# Altium PCB mosfet_STM32.PcbDoc
Units mm, origin at the board's own origin, x right, y up, seen from the top; angles counter-clockwise.
Board outline 43.5 x 29 mm, 2 copper layers (Top Layer, Bottom Layer); 31 components, 18 nets, 153 pads, 32 vias.
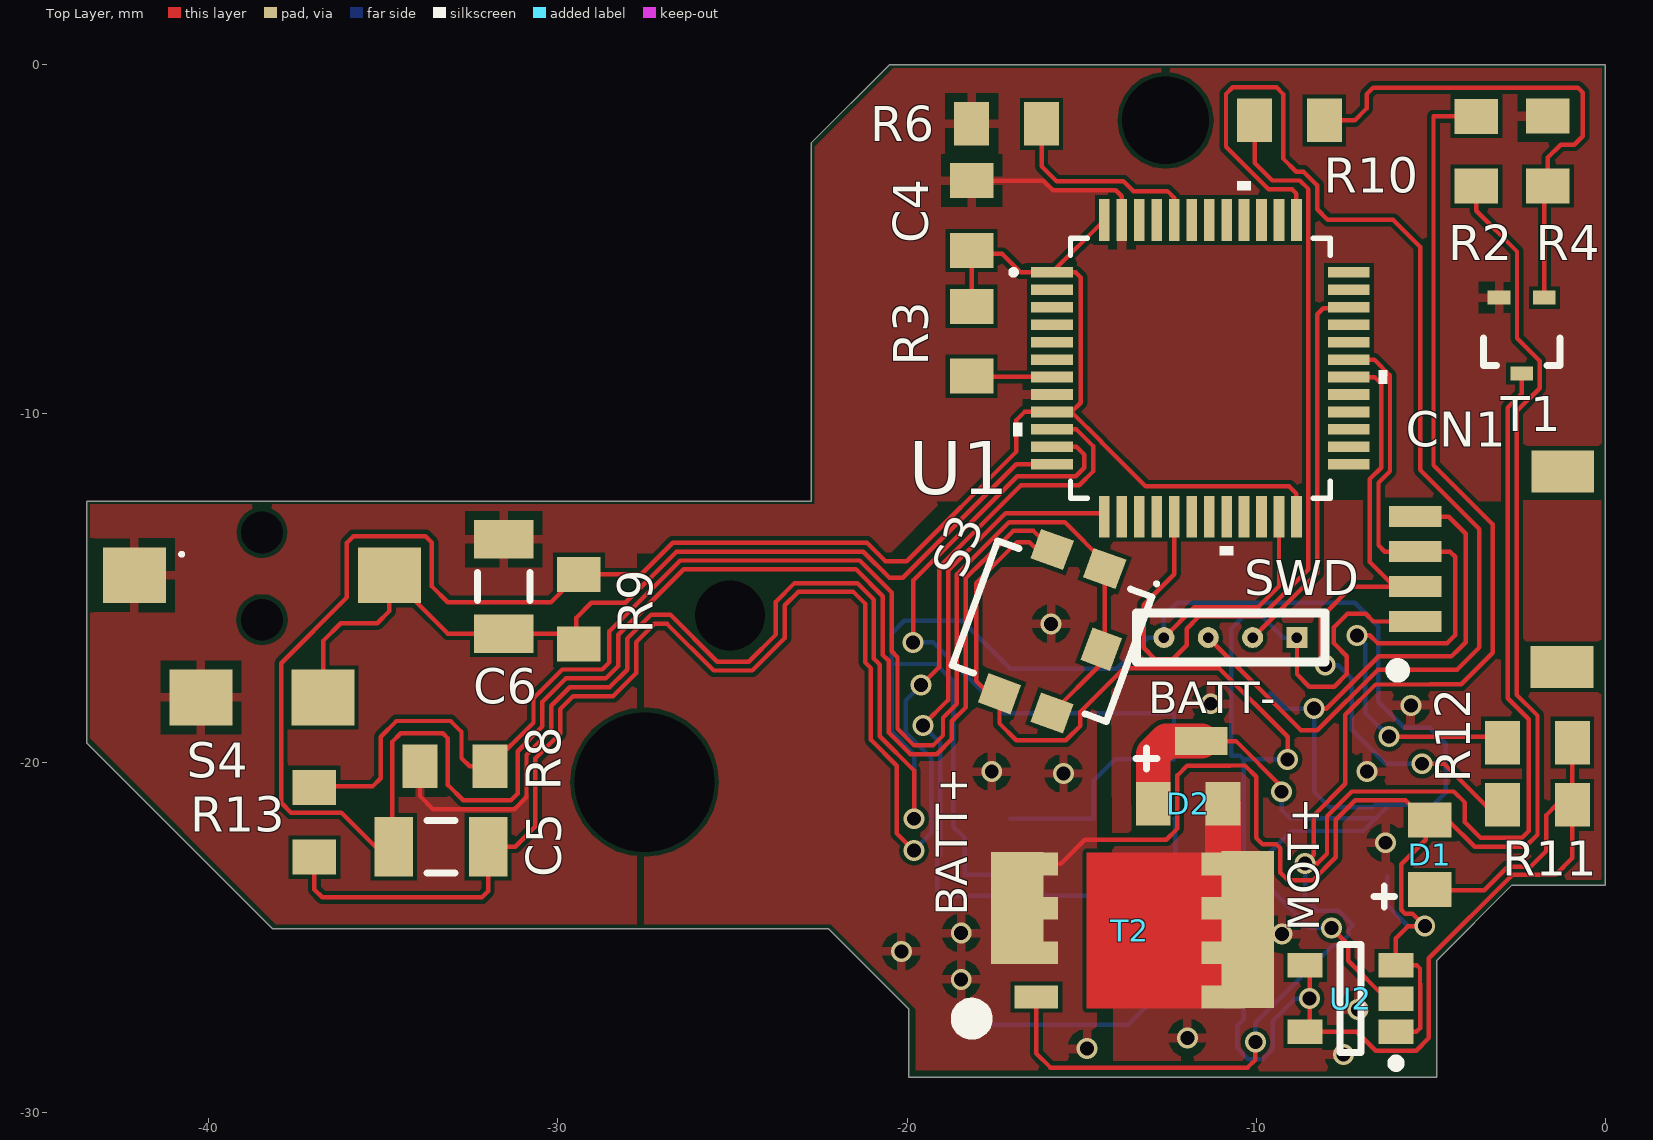
[diagram p0: Top Layer view]
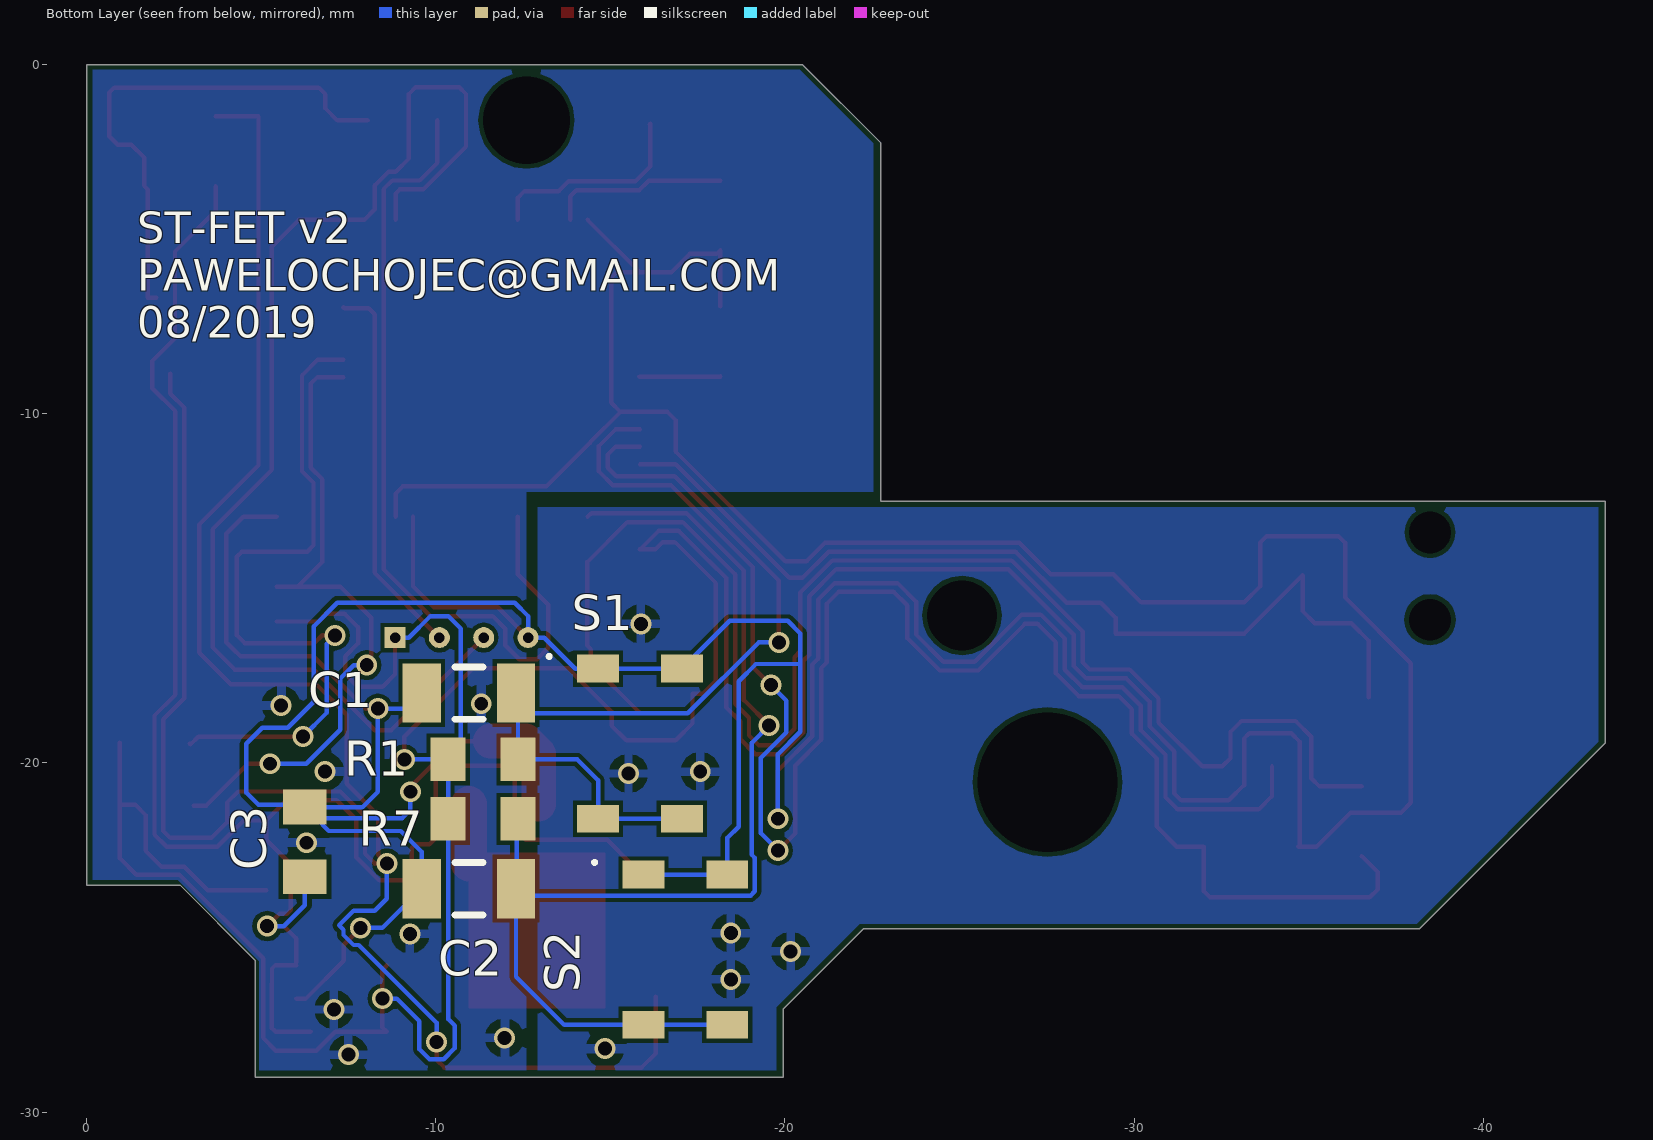
[diagram p1: Bottom Layer view, seen from below]
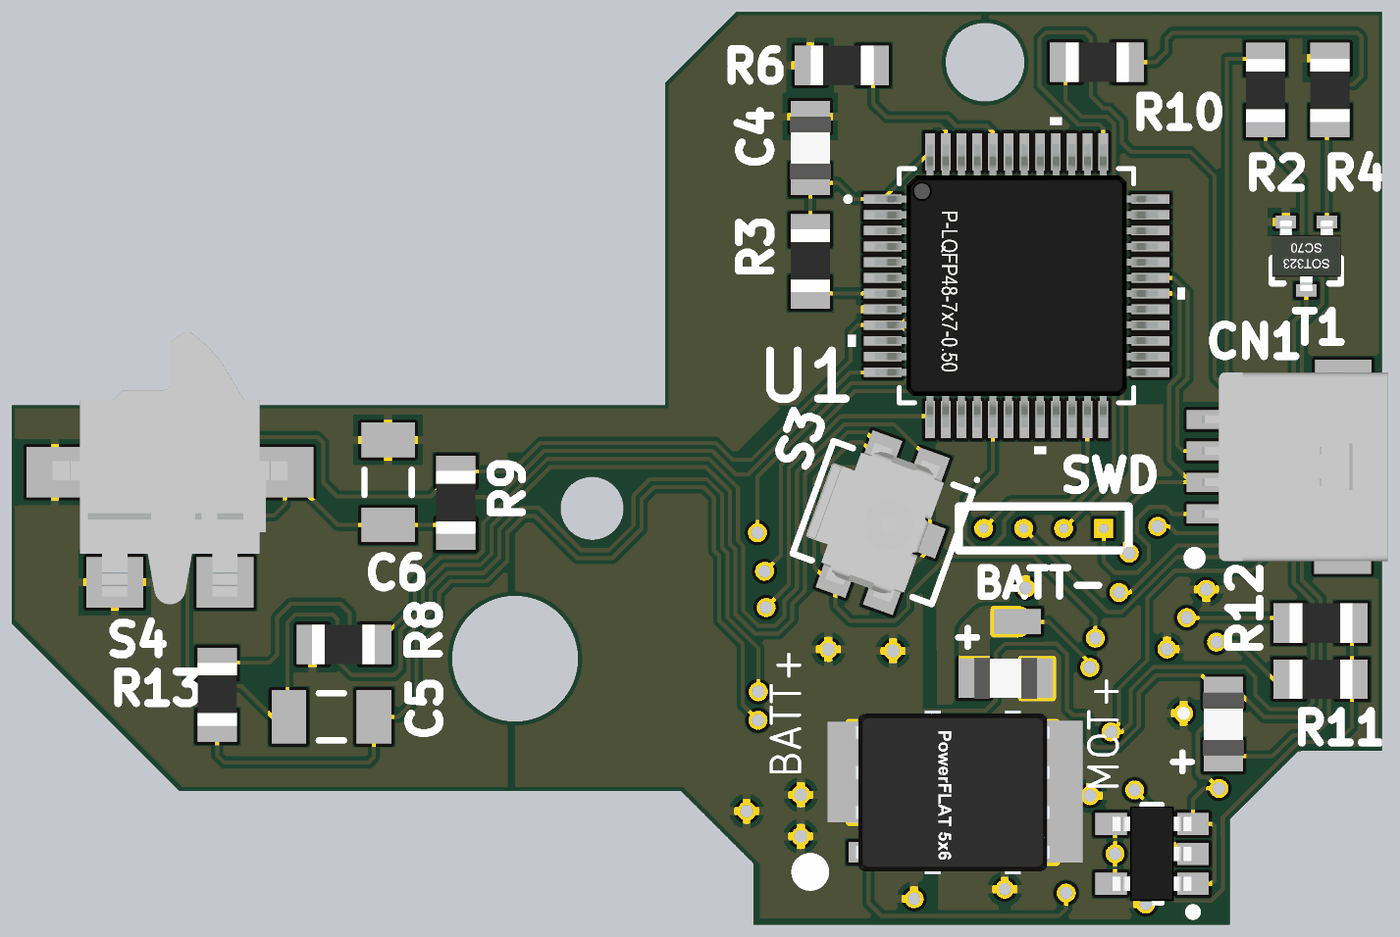
[diagram p2: 3D render of the assembled board from above, using the file's embedded part models]
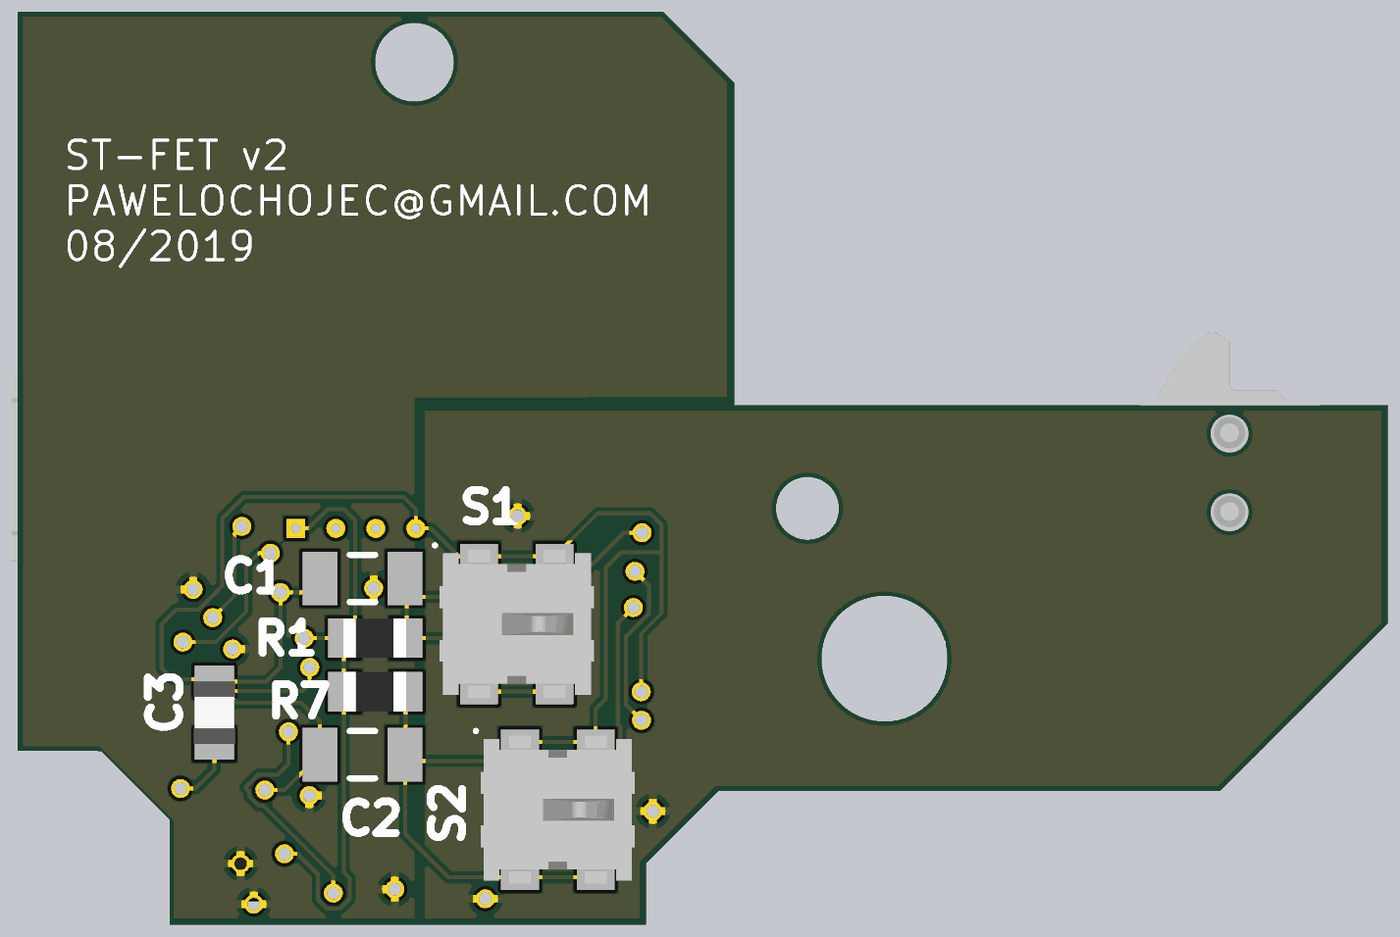
[diagram p3: 3D render of the assembled board from below, using the file's embedded part models]

## Layer stack, top to bottom
Top Solder: solder mask 0.0102, Solder Resist, Dk 3.5
Top Layer: signal copper 0.0356
Dielectric 1: dielectric 0.32, FR-4, Dk 4.8
Bottom Layer: signal copper 0.0356
Bottom Solder: solder mask 0.0102, Solder Resist, Dk 3.5

## Board outline
-22.25,-24.75 -19.95,-27.05 -19.95,-29 -4.825,-29 -4.825,-25.65 -2.675,-23.5 0,-23.5 0,0 -20.5,0 -22.75,-2.25 -22.75,-12.5 -33.45,-12.5 -43.5,-12.5 -43.5,-19.425 -38.175,-24.75

## Design rules (kind name [scope] priority, off if disabled: settings)
Clearance [All] p1: gap=0.127 ignorepadtopadclearanceinfootprint=FALSE
HoleSize [All] p1: absolutevalues=TRUE maxlimit=6.3 minlimit=0.2 maxpercent=80.000 minpercent=20.000
MinimumSolderMaskSliver [All] p1: minsoldermaskwidth=0
PolygonConnect PolygonConnect_2 [All vs IsNamedPolygon('Top Layer-MOT-')] p1: thpad.connectstyle=Direct thpad.reliefconductorwidth=0.254 thpad.reliefentries=4 thpad.polygonreliefangle="90 Angle" thpad.airgapwidth=0.254 smdpad.connectstyle=Direct smdpad.reliefconductorwidth=0.254 smdpad.reliefentries=4 smdpad.polygonreliefangle="90 Angle" smdpad.airgapwidth=0.254 via.connectstyle=Relief via.reliefconductorwidth=0.254 via.reliefentries=4 via.polygonreliefangle="90 Angle" via.airgapwidth=0.254
PolygonConnect PolygonConnect_1 [All vs IsNamedPolygon('Top Layer-BATT+')] p2: thpad.connectstyle=Direct thpad.reliefconductorwidth=0.254 thpad.reliefentries=4 thpad.polygonreliefangle="90 Angle" thpad.airgapwidth=0.254 smdpad.connectstyle=Direct smdpad.reliefconductorwidth=0.254 smdpad.reliefentries=4 smdpad.polygonreliefangle="90 Angle" smdpad.airgapwidth=0.254 via.connectstyle=Relief via.reliefconductorwidth=0.254 via.reliefentries=4 via.polygonreliefangle="90 Angle" via.airgapwidth=0.254
PolygonConnect [All] p3: connectstyle=Relief reliefconductorwidth=0.254 reliefentries=4 polygonreliefangle="90 Angle" airgapwidth=0.254
RoutingVias [All] p1: holewidth=0.711 width=1.27 viastyle="Through Hole" minholewidth=0.711 minwidth=1.27 maxholewidth=0.711 maxwidth=1.27
SolderMaskExpansion [All] p1: expansion=0.102
Width [All] p1: maxlimit=1.024 minlimit=0.127 preferedwidth=0.254
28 further rules are at their usual default settings.

## Components (designator, comment, footprint, x,y, rotation, side; value= is the part's Value field where it differs from the comment)
BATT- "BATT-" PAD_1,5X0,8 -11.575,-19.375 r180 top (schematic designator CN3)
C1 "Cap Semi" C1206 -10.95,-18 r180 bottom value=100nF
C2 "Cap Semi" C1206 -10.95,-23.6 r180 bottom value=100nF
C3 "CL21A106KOQNNNE" 0805 -6.25,-23.261 r180 bottom
C4 "CL21A226MQQNNNG" 0805 -18.15,-5.325 r0 top
C5 "Cap Semi" C1206 -33.35,-22.398 r0 top value=100nF
C6 "Cap Semi" C1206 -31.55,-14.95 r270 top value=100nF
CN1 "501568-0407" "MOLEX 4X1" -5.45,-15.95 r90 top
D1 "TS4148RYG" "0805 DIODE" -5.035,-22.63 r0 top
D2 "TS4148RYG" "0805 DIODE" -11.95,-21.175 r270 top
R1 "Resistor 0805" PCBComponent_1 -12.356,-19.9 r90 bottom value=10k
R2 "Resistor 0805" PCBComponent_1 -3.7,-1.484 r180 top value=10k
R3 "Resistor 0805" PCBComponent_1 -18.15,-8.925 r0 top value=10k
R4 "Resistor 0805" PCBComponent_1 -1.65,-1.477 r180 top value=100k
R6 "Resistor 0805" PCBComponent_1 -18.15,-1.7 r270 top value=510R
R7 "Resistor 0805" PCBComponent_1 -12.356,-21.6 r90 bottom value=10k
R8 "Resistor 0805" PCBComponent_1 -31.95,-20.1 r90 top value=10k
R9 "Resistor 0805" PCBComponent_1 -29.4,-16.6 r0 top value=10k
R10 "Resistor 0805" PCBComponent_1 -10.05,-1.6 r270 top value=1k
R11 "Resistor 0805" PCBComponent_1 -2.95,-21.2 r270 top value=4,7k
R12 "Resistor 0805" PCBComponent_1 -2.95,-19.421 r270 top value=4,7k
R13 "Resistor 0805" PCBComponent_1 -36.975,-22.7 r0 top value=10k
S1 "HDT0004" HDT0004 -12.75,-22.35 r180 bottom locked
S2 "HDT0004" HDT0004 -14.05,-28.25 r180 bottom locked
S3 "KMS221GPLFS" KMS221GLFS -15.85,-16.228 r250 top
S4 "HDP001L" HDP001L -38.475,-16.375 r0 top
SWD "3x1 pinout 1,27mm" "4X1 PINOUT 1,27MM" -8.835,-16.412 r180 top
T1 "BC817W,115" BC817W.115 -2.4,-7.95 r270 top
T2 "PowerFLAT 5x6 P-CH Transistor" "POWERFLAT 5X6" -13.625,-24.8 r180 top
U1 "stm32f030c6_c8t" LQFP48-7x7mm -11.6,-8.7 r0 top value=Value
U2 "MCP1755T-3302E/OT" "SOT 23-5, AP2127K-3.3TRG1" -7.3,-26.75 r180 top

## Footprints (in the part's own frame and the unit in brackets; to place one, negate y for a bottom-side part, rotate by r counter-clockwise, add the part's x,y. Pads: shape width x height; smd on the part's side, far side on the other; paste and mask are expansions set on the pad)
"4X1 PINOUT 1,27MM" [mm]
  rect 0.6x0.6 hole 0.3: 1(0,0)
  round 0.6 hole 0.3: 2(1.27,0) 3(2.54,0) 4(3.81,0)
  silkscreen extent -0.8,-0.7 4.6,0.7
0805 [mm]
  rect 1.25x1 smd: 1(0,0) 1(0,0) 2(0,2)
  body extent -0.65,0 0.66,2, height 0.77
"0805 DIODE" [mm]
  rect 1.25x1 smd: A(0,-1) K(0,1)
  silkscreen extent -1.6,-1.5 -1,-0.9, body extent -0.65,-1 0.66,1, height 0.77
BC817W.115 [mm] "SOT323, 3-Leads, Body 2,00x2,10mm, Pitch 1,30mm, IPC High Density"
  rect 0.4x0.65 smd: 1(-1.275,0.65) 2(-1.275,-0.65) 3(0.9,0)
  silkscreen extent -0.13,-1.1 0.67,1.1, body extent -1.32,-1.1 0.92,1.1, height 1.11
C1206 [mm] "Chip Capacitor, Body 3.2x1.6mm, IPC High Density"
  rect 1.1x1.7 smd: 1(-1.35,0) 2(1.35,0)
  silkscreen extent -0.4,-0.75 0.4,0.75, body extent -1.7,-0.9 1.7,0.9, height 1.3
HDP001L [mm]
  rect 1.8x1.6 smd: A(-1.75,-1.75) B(1.75,-1.75) C(-3.65,1.75) D(3.65,1.75)
  silkscreen extent -2.35,2.3 -2.25,2.4, body extent -3.72,-2.45 3.73,6.2, height 1.91
HDT0004 [mm]
  rect 1.2x0.8 smd: 1(1.9,5.05) 2(4.3,5.05) 3(1.9,0.75) 4(4.3,0.75)
  silkscreen extent 0.45,5.35 0.55,5.45, body extent 0.65,0.55 5.55,5.25, height 3.78
KMS221GLFS [mm]
  rect 0.9x1 smd: 1(-2.2,-0.8) 2(-2.2,0.8) 4(2.2,0.8) 5(2.2,-0.8)
  rect 1x0.9 smd: 3(0,1.5)
  silkscreen extent -2.35,-2.35 1.9,2.4, body extent -2.3,-2.15 2.3,1.4, height 1.43
LQFP48-7x7mm [mm]
  rect 1.194x0.305 smd: 1(-4.25,2.75) 2(-4.25,2.25) 3(-4.25,1.75) 4(-4.25,1.25) 5(-4.25,0.75) 6(-4.25,0.25) 7(-4.25,-0.25) 8(-4.25,-0.75) 9(-4.25,-1.25) 10(-4.25,-1.75) 11(-4.25,-2.25) 12(-4.25,-2.75) 25(4.25,-2.75) 26(4.25,-2.25) 27(4.25,-1.75) 28(4.25,-1.25) 29(4.25,-0.75) 30(4.25,-0.25) 31(4.25,0.25) 32(4.25,0.75) 33(4.25,1.25) 34(4.25,1.75) 35(4.25,2.25) 36(4.25,2.75)
  rect 0.305x1.194 smd: 13(-2.75,-4.25) 14(-2.25,-4.25) 15(-1.75,-4.25) 16(-1.25,-4.25) 17(-0.75,-4.25) 18(-0.25,-4.25) 19(0.25,-4.25) 20(0.75,-4.25) 21(1.25,-4.25) 22(1.75,-4.25) 23(2.25,-4.25) 24(2.75,-4.25) 37(2.75,4.25) 38(2.25,4.25) 39(1.75,4.25) 40(1.25,4.25) 41(0.75,4.25) 42(0.25,4.25) 43(-0.25,4.25) 44(-0.75,4.25) 45(-1.25,4.25) 46(-1.75,4.25) 47(-2.25,4.25) 48(-2.75,4.25)
  silkscreen extent -5.43,-5.35 5.35,5.35, body extent -4.5,-4.5 4.5,4.5, height 1.46
"MOLEX 4X1" [mm] "raster 1mm"
  rect 0.6x1.5 smd: 1(0,0) 2(1,0) 3(2,0) 4(3,0)
  rect 1.2x1.8 smd: GND(-1.3,-4.2) GND(4.3,-4.225)
  silkscreen extent -1.55,0.35 -1.25,0.65, body extent -1.5,-5.62 4.5,0.28, height 3.21
PAD_1,5X0,8 [mm]
  rect 1.5x0.8 smd: 1(0,0)
PCBComponent_1 [mm]
  rect 1.25x1 smd: 1(0,0) 1(0,0) 2(0,2)
  body extent -0.62,0 0.63,2.02, height 3
"POWERFLAT 5X6" [mm] "PowerFLAT 5x6, 8-Leads, Body 5,20x5,00mm, Pitch 1,27mm, IPC High Density"
  rect 1.25x0.65 smd: D(-2.675,1.905) D(-2.675,-0.635) D(-2.675,0.635) D(-2.675,-1.905) G(2.675,1.905) S(2.675,-0.635) S(2.675,0.635) S(2.675,-1.905)
  Top Layer region: -2.65,2.325
  Top Layer region: -2.675,2.225 1.225,2.225 1.225,-2.225 -2.675,-2.225
  silkscreen extent 4.23,2.23 4.82,2.82, body extent -3.07,-2.6 3.08,2.6, height 0.95
"SOT 23-5, AP2127K-3.3TRG1" [mm] "SOT23, 5-Leads, Body 2,96x2,83mm, Pitch 0,95mm, IPC High Density"
  rect 1x0.7 smd: 1(-1.3,0.95) 2(-1.3,0) 3(-1.3,-0.95) 4(1.3,-0.95) 5(1.3,0.95)
  silkscreen extent -1.43,-1.55 0.3,1.97, body extent -1.25,-1.5 1.25,1.5, height 1.11

## Part data
BATT-: library part PAD_1,5x0,8
C1 C2 C5 C6: "Capacitor (Semiconductor SIM Model)", LatestRevisionDate=29-May-2009, LatestRevisionNote="IPC-7351 Footprint Added.", PackageDescription="Chip Capacitor", PackageReference=C1206, Published=8-Jun-2000, Publisher="Altium Limited"
C3: "Cap Ceramic 10uF 16V X5R 10% SMD 0805 85C T/R", Capacitance=10uF, Case/Package=0805, Case Code (Metric)=2012, Dielectric=X7R, Manufacturer=Samsung, Max Operating Temperature=85°C, Min Operating Temperature=-55°C, Package Quantity=1, Tolerance=10%, Voltage=16V, Case Code (Imperial)=0805, ComponentLink1Description=http://www.samsungsem.com/kr/support/product-search/mlcc/CL21A106KOQNNNE.jsp?src-supplier=Digi-Key, ComponentLink1URL=http://www.samsungsem.com/kr/support/product-search/mlcc/CL21A106KOQNNNE.jsp?src-supplier=Digi-Key, ComponentLink2Description=http://www1.futureelectronics.com/doc/SAMSUNG%20PASSIVE/CL05B104KQ5NNNC.pdf?src-supplier=Future+Electronics, ComponentLink2URL=http://www1.futureelectronics.com/doc/SAMSUNG%20PASSIVE/CL05B104KQ5NNNC.pdf?src-supplier=Future+Electronics, ComponentLink3Description=https://www.verical.com/server-webapp/html/getDatasheet?partID=358435&src-supplier=Verical, ComponentLink3URL=https://www.verical.com/server-webapp/html/getDatasheet?partID=358435&src-supplier=Verical, Depth=1.25mm, Height=1.25mm, Lead Free="Lead Free", Length=2mm, Manufacturer Part Number=CL21A106KOQNNNE, Mount="Surface Mount", Packaging="Tape and Reel", Pricing 1="100=0.02993, 300=0.02117, 1000=0.01541, 2000=0.01308, 10000=0.01253 (USD)", Radiation Hardening=No, Stock 1=80000, Supplier 1=TME, Supplier Part Number 1=CL21A106KOQNNNE, Thickness=0.055inch, Voltage Rating=16V, Voltage Rating (DC)=16V, Width=0.049inch
C4: "Cap Ceramic 22uF 6.3V X5R 20% SMD 0805 85C Embossed T/R", Capacitance=22uF, Case/Package=0805, Case Code (Metric)=2012, Dielectric=X5R, Manufacturer=Samsung, Max Operating Temperature=85°C, Min Operating Temperature=-55°C, Package Quantity=3000, Tolerance=20%, Voltage=6.3V, Case Code (Imperial)=0805, ComponentLink1Description=http://www.samsungsem.com/kr/support/product-search/mlcc/CL21A226MQQNNNG.jsp?src-supplier=Digi-Key, ComponentLink1URL=http://www.samsungsem.com/kr/support/product-search/mlcc/CL21A226MQQNNNG.jsp?src-supplier=Digi-Key, ComponentLink2Description=https://produktinfo.conrad.com/datenblaetter/450000-474999/454647-da-01-en-VS_KONDENSATOR_0805.pdf?src-supplier=Conrad, ComponentLink2URL=https://produktinfo.conrad.com/datenblaetter/450000-474999/454647-da-01-en-VS_KONDENSATOR_0805.pdf?src-supplier=Conrad, Depth=1.25mm, Height=1.25mm, Length=2mm, Manufacturer Part Number=CL21A226MQQNNNG, Material=Ceramic, Mount="Surface Mount", Packaging="Tape and Reel", Pricing 1="100=0.03725, 300=0.0296, 1000=0.02317, 3000=0.01829, 12000=0.0174 (USD)", Radiation Hardening=No, Stock 1=38100, Supplier 1=TME, Supplier Part Number 1=CL21A226MQQNNNG, Thickness=0.055inch, Voltage Rating=6.3V, Width=0.049inch
CN1: "Conn Shrouded Header HDR 4 POS 1mm Solder RA SMD Pico-Clasp™ T/R", Color=Natural, Current Rating=1A, Manufacturer=Molex, Max Operating Temperature=85°C, Max Voltage Rating (AC)=50V, Max Voltage Rating (DC)=5.05kV, Min Operating Temperature=-40°C, Package Quantity=1700, Supplier Part Number 1=MX-501568-0407, ComponentLink1Description=http://www.molex.com/webdocs/datasheets/pdf/en-us/5015680407_PCB_HEADERS.pdf?src-supplier=Mouser, ComponentLink1URL=http://www.molex.com/webdocs/datasheets/pdf/en-us/5015680407_PCB_HEADERS.pdf?src-supplier=Mouser, ComponentLink2Description=http://www.onlinecomponents.com/productFiles/mf-MOL/940865015680407_pcb_headers.pdf?src-supplier=Onlinecomponents.com, ComponentLink2URL=http://www.onlinecomponents.com/productFiles/mf-MOL/940865015680407_pcb_headers.pdf?src-supplier=Onlinecomponents.com, ComponentLink3Description=http://www.molex.com/webdocs/datasheets/pdf/en-us/5015680407_PCB_HEADERS.pdf?src-supplier=Avnet, ComponentLink3URL=http://www.molex.com/webdocs/datasheets/pdf/en-us/5015680407_PCB_HEADERS.pdf?src-supplier=Avnet, ComponentLink4Description=https://www.molex.com/pdm_docs/ps/PS-501568-001.pdf?src-supplier=Digi-Key, ComponentLink4URL=https://www.molex.com/pdm_docs/ps/PS-501568-001.pdf?src-supplier=Digi-Key, ComponentLink5Description=http://uk.rs-online.com/webdocs/13c5/0900766b813c54a0.pdf?src-supplier=RSComponents, ComponentLink5URL=http://uk.rs-online.com/webdocs/13c5/0900766b813c54a0.pdf?src-supplier=RSComponents, ComponentLink6Description=http://www.molex.com/webdocs/datasheets/pdf/en-us/5015680407_PCB_HEADERS.pdf?src-supplier=Avnet+Europe, ComponentLink6URL=http://www.molex.com/webdocs/datasheets/pdf/en-us/5015680407_PCB_HEADERS.pdf?src-supplier=Avnet+Europe, Connector Type="Male Pin", Contact Material=Bronze,Brass, Contact Plating=Tin, Depth=5.35mm, Fastening Type=Detent, Gender=Male, Glow Wire Compliant=Non-compliant, Housing Color=Natural, Housing Material=Nylon, Lead Free="Lead Free", Length=6mm, Manufacturer Part Number=501568-0407, Mount="Surface Mount", Number of Circuits=4, Number of Contacts=4, Number of Positions=4, Number of Rows=1, Orientation="Right Angle", Packaging="Tape and Reel", Pitch=1mm, Pricing 1="2=0.59, 20=0.53, 100=0.48, 500=0.42 (USD)", Radiation Hardening=No, REACH SVHC=Unknown, Stock 1=1606, Supplier 1=TME, Termination=Solder, Voltage Rating=50V, Voltage Rating (AC)=50V
D1 D2: "Diode Small Signal Switching 75V 0.15A 2-Pin Case 0805 T/R", Case/Package=SMD/SMT, Forward Voltage=1V, Manufacturer="Taiwan Semiconductor", Max Forward Surge Current (Ifsm)=2A, Max Operating Temperature=175°C, Max Repetitive Reverse Voltage (Vrrm)=75V, Min Operating Temperature=-65°C, Supplier Part Number 1=TS4148-RYG, ComponentLink1Description=http://www.rapidonline.com/pdf/47-1004.pdf?src-supplier=Rapid+Electronics, ComponentLink1URL=http://www.rapidonline.com/pdf/47-1004.pdf?src-supplier=Rapid+Electronics, ComponentLink2Description=https://www.verical.com/server-webapp/html/getDatasheet?partID=461722&src-supplier=Verical, ComponentLink2URL=https://www.verical.com/server-webapp/html/getDatasheet?partID=461722&src-supplier=Verical, Element Configuration=Single, Manufacturer Part Number=TS4148RYG, Mount="Surface Mount", Number of Pins=2, Packaging="Tape and Reel", Peak Non-Repetitive Surge Current=2A, Pricing 1="25=0.0275, 100=0.018, 500=0.0144, 1000=0.0129, 5000=0.012 (USD)", Radiation Hardening=No, Reverse Recovery Time=4ns, Stock 1=145631, Supplier 1=TME
R1 R2 R3 R4 R6 R7 R8 R9 R10 R11 R12 R13: library part 0805S8F1000T5E, "Resistor: thick film; SMD; 0805; 100O; 0.125W; ±1%; -55÷125°C", Manufacturer="Royal Electronic Factory", Manufacturer Part Number=0805S8F1000T5E, Pricing 1="5000=0.00537, 50000=0.00395, 200000=0.0037 (USD)", Stock 1=100000, Supplier 1=TME, Supplier Part Number 1=0805S8F1000T5E
S1 S2: "SWITCH DETECT MICRO SPST SMD 5V", Case/Package=SMD/SMT, Contact Current Rating=1mA, Contact Resistance=500mR, Manufacturer="ITT C&K", Max Operating Temperature=85°C, Max Voltage Rating (DC)=5V, Min Operating Temperature=-40°C, Operating Force=0.34N, Operating Position=0.138inch, Package Quantity=1, Actuator Length=1.5mm, Actuator Type=Lever, ComponentLink1Description=http://www.farnell.com/datasheets/1707717.pdf?src-supplier=Element14, ComponentLink1URL=http://www.farnell.com/datasheets/1707717.pdf?src-supplier=Element14, ComponentLink2Description=http://www.ck-components.com/index.php?module=media&action=Display&cmpref=15147&lang=en&width=&height=&format=&alt=&src-supplier=Digi-Key, ComponentLink2URL=http://www.ck-components.com/index.php?module=media&action=Display&cmpref=15147&lang=en&width=&height=&format=&alt=&src-supplier=Digi-Key, ComponentLink3Description=https://www.ckswitches.com/media/1307/hdt.pdf?src-supplier=Digi-Key, ComponentLink3URL=https://www.ckswitches.com/media/1307/hdt.pdf?src-supplier=Digi-Key, Contact Material=Bronze,Silver, Current Rating=1mA, Electrical Life=100000Cycles, Height=2.3mm, Lead Free="Lead Free", Manufacturer Part Number=HDT0004, Mechanical Life=100000Cycles, Mount="Surface Mount", Number of Terminals=4, Orientation=Straight, Overtravel=0.039inch, Packaging="Tape and Reel", Pretravel=0.012inch, Pricing 1="1=0.9131, 5=0.8114, 20=0.7611, 100=0.7108, 500=0.6851 (USD)", REACH SVHC="No SVHC", Stock 1=2654, Supplier 1=TME, Supplier Part Number 1=HDT0004, Switch Function=Off-Mom, Termination=SMD/SMT, Throw Configuration=SPST, Voltage Rating (DC)=5V, Width=3.8mm
S3: "SWITCH TACTILE SPST-NO 0.05A 50V", Contact Current Rating=50mA, Manufacturer="ITT C&K", Max Operating Temperature=85°C, Max Voltage Rating (DC)=32V, Min Operating Temperature=-40°C, Operating Force=2N, Package Quantity=1, Power Rating=1W, Ratings=IP40, Actuator Length=0.75mm, ComponentLink1Description=http://www.ck-components.com/index.php?module=media&action=Display&cmpref=14416&lang=en&width=&height=&format=&alt=&src-supplier=Digi-Key, ComponentLink1URL=http://www.ck-components.com/index.php?module=media&action=Display&cmpref=14416&lang=en&width=&height=&format=&alt=&src-supplier=Digi-Key, ComponentLink2Description=http://www.ck-components.com/14416/kms_31aug10.pdf/?src-supplier=Mouser, ComponentLink2URL=http://www.ck-components.com/14416/kms_31aug10.pdf/?src-supplier=Mouser, ComponentLink3Description=https://www.ckswitches.com/media/1482/kms.pdf?src-supplier=Digi-Key, ComponentLink3URL=https://www.ckswitches.com/media/1482/kms.pdf?src-supplier=Digi-Key, Contact Material=Silver, Contact Plating=Silver, Current Rating=50mA, Depth=4.6mm, Illumination Type=Non-Illuminated, Lead Free="Lead Free", Length=3.55mm, Manufacturer Part Number=KMS221GPLFS, Max Current Rating=50mA, Mechanical Life=100000Cycles, Mount="Surface Mount", Orientation="Right Angle", Packaging="Tape and Reel", Radiation Hardening=No, Stock 1=0, Supplier 1=TME, Supplier Part Number 1=KMS221GPLFS, Switch Function=Off-Mom, Switch Travel=0.25mm, Termination="Gull Wing", Throw Configuration=SPST, Voltage Rating (DC)=32V, Width=1.42mm
T1: "TRANS NPN 45V 0.5A SOT323", Manufacturer="Nexperia USA", Supplier Part Number 1=2439014, Manufacturer Part Number=BC817W,115, Stock 1=0, Supplier 1=Farnell
T2: library part STL42P6LLF6, "MOSFET P-CH 60V 42A 8POWERFLAT", Continuous Drain Current (ID)=42A, Drain to Source Resistance=34mR, Drain to Source Voltage (Vdss)=60V, Gate to Source Voltage (Vgs)=20V, Input Capacitance=3.78nF, Manufacturer=STMicroelectronics, Max Operating Temperature=175°C, Max Power Dissipation=100W, Element Configuration=Single, Height=0.95mm, Lead Free="Lead Free", Length=6.35mm, Manufacturer Part Number=STL42P6LLF6, Mount="Surface Mount", Number of Pins=8, Packaging="Tape and Reel", Pricing 1="1=1.13, 5=1.02, 25=0.89, 100=0.8 (USD)", Rds On Max=26mR, Stock 1=0, Supplier 1=TME, Supplier Part Number 1=STL42P6LLF6, Turn-Off Delay Time=171ns, Turn-On Delay Time=51.4ns, Width=5.4mm
U1: library part STM32F030C6_C8T, "No Description Available", Copyright="Copyright (C) 2016 Accelerated Designs. All rights reserved", Manufacturer_Part_Number=stm32f030c6_c8t, RefDes=RefDes, Type=DEV, Vendor=STMicroelectronics
U2: "MICROCHIP   MCP1755T-3302E/OT   IC, LDO VOLT REG, 3.3V, 0.3A, SOT23-5", Case/Package=SOT-23-5, Dropout Voltage=300mV, Manufacturer=Microchip, Max Input Voltage=16V, Max Operating Temperature=125°C, Max Output Current=300mA, Min Input Voltage=3.6V, Min Operating Temperature=-40°C, Nominal Output Voltage=3.3V, Nominal Supply Current=68uA, Output Voltage Accuracy=2%, Package Quantity=3000, Power Supply Rejection Ratio (PSRR)=80dB, Quiescent Current=100uA, Accuracy=2%, ComponentLink1Description=http://www.microchip.com/mymicrochip/filehandler.aspx?ddocname=en533805&src-supplier=Digi-Key, ComponentLink1URL=http://www.microchip.com/mymicrochip/filehandler.aspx?ddocname=en533805&src-supplier=Digi-Key, ComponentLink2Description=http://www.microchip.com/mymicrochip/filehandler.aspx?ddocname=en560605&src-supplier=Digi-Key, ComponentLink2URL=http://www.microchip.com/mymicrochip/filehandler.aspx?ddocname=en560605&src-supplier=Digi-Key, ComponentLink3Description=http://www.farnell.com/datasheets/1697992.pdf?src-supplier=Element14, ComponentLink3URL=http://www.farnell.com/datasheets/1697992.pdf?src-supplier=Element14, ComponentLink4Description=https://www.verical.com/server-webapp/html/getDatasheet?partID=775879&src-supplier=Verical, ComponentLink4URL=https://www.verical.com/server-webapp/html/getDatasheet?partID=775879&src-supplier=Verical, Lead Free="Lead Free", Manufacturer Part Number=MCP1755T-3302E/OT, Mount="Surface Mount", Number of Outputs=1, Number of Pins=5, Number of Regulators=1, Output Current=300mA, Output Type=Fixed, Output Voltage=3.3V, Packaging="Tape and Reel", Polarity=Positive, Pricing 1="3=0.75, 10=0.73, 25=0.62, 100=0.57 (USD)", Radiation Hardening=No, REACH SVHC="No SVHC", Stock 1=13, Supplier 1=TME, Supplier Part Number 1=MCP1755T-3302E/OT, Tolerance=2%

## Free pads (board coordinates)
  round 0.5 hole 1.2 unplated: ""(-38.475,-15.9) ""(-38.475,-13.4)
  round 3.5 hole 4 unplated: ""(-27.519,-20.55)
  round 1.5 hole 2 unplated: ""(-25.075,-15.775)
  rect 1.5x3.2 smd paste+0 mask+0: ""(-16.85,-24.155)
  round 2 hole 2.5 unplated: ""(-12.6,-1.6)
  rect 1.5x4.5 smd paste+0 mask+0: ""(-10.25,-24.775)

## Via types
v1: diameter 0.6, hole 0.4, Top Layer to Bottom Layer, 32 vias

## Nets (pads, with @x,y where several pads share a name; then routed paths per layer and width w, separated by ;. In a path a pad name is that pad's centre, name@x,y a point inside that pad or via, vN(x,y) a via of type N, cw(c..) or ccw(c..) an arc to the next point about the centre after c; other vN are vias at no path point)
3.3V: C4.1 C5.1 CN1.1 D1.A R1.2 R3.2 R7.2 R9.2 R11.2 R12.2 S3.1 S3.5 SWD.1 U1.1 U1.9 U1.24 U1.48 U2.4 U2.5 | length 161.5
  Top Layer w0.127: R3.2 -18.15,-5.325 -18.05,-5.425 -17.275,-5.425 -16.75,-5.95 U1.1 ; U1.48 U1.1 ; v1(-9.1,-19.9) -9.1,-19.255 -11.066,-17.289 -13.789,-17.289 -15.036,-18.536 -15.036,-18.934 -15.456,-19.354 -16.871,-19.354 -17.354,-18.871 S3.5 -17.653,-18.022 -18.025,-17.65 -18.025,-14.85 -16.85,-13.675 -16.5,-13.675 -16.288,-13.887 S3.1 -16.38,-13.357 -16.963,-13.357 -17.815,-14.209 -17.822,-14.209 -18.319,-14.705 -18.319,-18.412 -18.718,-18.811 -18.718,-19.318 -19.153,-19.754 -19.905,-19.754 -20.529,-19.13 -20.529,-17.078 -20.696,-16.911 -20.696,-15.226 -21.465,-14.457 -26.395,-14.457 -28.271,-16.333 -28.271,-17.225 -28.625,-17.579 -29.77,-17.579 -30.446,-18.255 -30.446,-18.955 -31.154,-19.663 -31.154,-20.879 -31.346,-21.071 -32.715,-21.071 -33.15,-20.636 -33.15,-19.3 -33.3,-19.15 -34.5,-19.15 -34.75,-19.4 -34.75,-22.348 C5.1 -35.227,-22.398 -36.2,-21.425 -37.644,-21.425 -37.925,-21.144 -37.925,-17.143 -36.043,-15.26 -36.043,-13.693 -35.857,-13.507 -33.793,-13.507 -33.607,-13.693 -33.607,-14.949 -33.156,-15.4 -30.2,-15.4 R9.2 -27.615,-14.6 -26.711,-13.695 -21.149,-13.695 -20.62,-14.225 -20.009,-14.225 -16.869,-11.084 -16.869,-10.181 -16.638,-9.95 U1.9 U1.9@-15.291,-9.95 ; U1.24 -8.85,-12.289 -9.056,-12.083 -13.167,-12.083 -14.421,-10.829 -14.421,-10.82 U1.9@-15.291,-9.95 ; SWD.1 -8.835,-17.465 -8.483,-17.818 -7.769,-17.818 -7.408,-17.456 -7.408,-16.944 -7.776,-16.576 -7.776,-16.117 -7.389,-15.73 -6.865,-15.73 -6.645,-15.95 CN1.1 ; U2.4 -8.475,-25.925 v1(-8.475,-26.75) -8.475,-27.575 U2.5 -7.119,-27.7 -6.579,-28.241 -5.421,-28.241 -5.055,-27.875 -5.055,-26.216 -5.057,-26.214 -5.057,-25.597 -2.66,-23.2 -1.425,-23.2 -0.95,-22.725 R11.2 -1.4,-21.2 -1.692,-21.492 -1.692,-22.517 -2.15,-22.975 -2.8,-22.975 -3.475,-23.65 D1.A@-5.15,-23.65 ; R11.2@-0.95,-21.225 R12.2 ; U1.1 -15.175,-5.95 -15.025,-6.1 -15.025,-9.684 U1.9@-15.291,-9.95
  Bottom Layer w0.127: -10.542,-28.175 -10.542,-27.522 -10.356,-27.335 R7.2 R1.2 ; -10.541,-28.175 -10.228,-28.488 -9.822,-28.488 -9.534,-28.201 -9.534,-27.403 -8.882,-26.75 v1(-8.475,-26.75) ; v1(-9.1,-19.9) R1.2 ; SWD.1 -9.232,-16.412 -9.849,-15.795 -10.361,-15.795 -10.723,-16.157 -10.723,-19.79 -10.466,-19.79 R1.2
AUTO: C2.2 R7.1 S2.3 S2.4 U1.13 | length 33
  Top Layer w0.127: v1(-19.55,-18.925) -18.827,-18.202 -18.827,-14.495 -17.181,-12.849 -14.451,-12.849 U1.13
  Bottom Layer w0.127: v1(-19.55,-18.925) -19.056,-19.419 -19.056,-22.636 -19.141,-22.721 -19.141,-23.679 -19.019,-23.8 -12.618,-23.8 -12.318,-23.5 -12.318,-21.639 R7.1@-12.356,-21.6 ; S2.4 S2.3 -13.675,-27.5 -12.3,-26.125 C2.2
BATT+: C3.1 D1.K pad.@-16.85,-24.155 R2.2 T2.S U2.1 U2.3 | length 52.4
  Top Layer w0.127: T2.S@-16.3,-22.885 -15.595,-22.885 -14.91,-22.2 -12.581,-22.2 -12.259,-21.879 -12.259,-20.359 -11.978,-20.078 -10.746,-20.078 -10.744,-20.075 -10.325,-20.075 -10,-20.4 -10,-22.15 -9.815,-22.334 -9.421,-22.334 -9.309,-22.446 -9.309,-23.15 -9.093,-23.367 -8.382,-23.367 -7.721,-22.705 -7.721,-21.63 -7.164,-21.073 -5.727,-21.073 D1.K@-5.15,-21.65 ; U2.1@-6.425,-27.7 U2.1 -5.415,-27.7 -5.309,-27.594 -5.309,-26.321 -5.311,-26.319 -5.311,-25.889 -5.4,-25.8 U2.3 ; U2.3@-6,-25.702 -6,-25.019 -5.656,-24.675 v1(-5.175,-24.675) -5.529,-24.321 -5.739,-24.321 -5.851,-24.209 -5.851,-22.904 -5.15,-22.203 D1.K@-5.15,-21.65 ; R2.2 -3.7,-4.191 -2.535,-5.357 -2.535,-7.84 -1.884,-8.491 -1.884,-9.269 -2.546,-9.93 -2.546,-18.045 -1.946,-18.645 -1.946,-22.055 -2.295,-22.404 -3.746,-22.404 -4.5,-21.65 D1.K@-5.15,-21.65
  Bottom Layer w0.127: C3.1@-6.25,-23.261 -6.25,-24.075 -5.65,-24.675 v1(-5.175,-24.675)
  other v1: -14.85,-28.182 -18.45,-26.198 -20.166,-25.397 -18.45,-24.875 -15.523,-20.302 -17.576,-20.251 -15.874,-16.017
GEAR: C6.2 R9.1 S4.B S4.D U1.12 | length 27.5
  Top Layer w0.127: S4.B -36.725,-16.507 -36.218,-16 -35.175,-16 -34.825,-15.65 S4.D -33.15,-16.3 C6.2 -29.473,-16.3 -29.473,-15.848 -29.043,-15.418 -28.073,-15.418 -26.605,-13.949 -21.255,-13.949 -20.504,-14.7 -20.125,-14.7 -16.875,-11.45 U1.12
GND: BATT-.1 C1.1 C2.1 C3.2 C4.2 C6.1 CN1.4 D2.A R4.1 R6.1 R8.2 S1.1 S1.2 S2.1 S2.2 S4.A S4.C SWD.4 T1.2 U1.8 U1.23 U1.47 U2.2 | length 112.4
  Top Layer w0.127: R8.2 -33.95,-20.95 -33.575,-21.325 -31.241,-21.325 -30.9,-20.984 -30.9,-19.768 -30.192,-19.06 -30.192,-18.36 -29.665,-17.833 -28.52,-17.833 -28.017,-17.33 -28.017,-16.439 -27.331,-15.753 -26.781,-15.753 -25.434,-17.1 -24.537,-17.1 -23.757,-16.321 -23.757,-15.382 -23.225,-14.85 -21.432,-14.85 -20.95,-15.331 -20.95,-17.016 -20.783,-17.184 -20.783,-19.235 -19.8,-20.218 v1(-19.8,-21.6) ; C4.2 -16.1,-3.325 -15.825,-3.6 -14.025,-3.6 -13.85,-3.775 U1.47 ; SWD.4 -11.774,-15.541 -9.952,-15.541 -9.35,-14.939 U1.23 ; BATT-.1@-11.15,-19.375 -10.581,-19.375 -9.275,-20.681 v1(-9.275,-20.826) ; v1(-8.346,-18.447) -7.994,-18.447 -6.495,-16.949 -4.411,-16.949 -4.204,-16.742 -4.202,-16.742 -4.001,-16.542 -4.001,-13.438 -4.49,-12.95 CN1.4 ; v1(-7.85,-24.725) -7.369,-25.206 -7.369,-25.664 -6.284,-26.75 U2.2
  Top Layer w1: D2.A -12.95,-19.749 -12.576,-19.375 BATT-.1
  Bottom Layer w0.127: v1(-19.8,-21.6) -19.8,-19.75 -20.442,-19.108 -20.442,-17.175 ; S2.1 S2.2 -18.35,-22.15 -18.675,-21.825 -18.675,-17.663 -19.17,-17.167 -20.435,-17.167 -20.442,-17.175 ; C1.1 -9.153,-18.447 v1(-8.346,-18.447) -8.346,-20.829 -7.9,-21.275 C3.2@-6.675,-21.275 ; v1(-9.275,-20.826) -9.275,-21.35 -9.044,-21.581 C3.2@-6.57,-21.581 ; v1(-7.85,-24.725) -8.475,-24.725 C2.1 -9.6,-22.55 -9,-21.95 -6.939,-21.95 C3.2@-6.57,-21.581 ; C3.2@-6.6,-21.2 -4.925,-21.2 -4.575,-20.85 -4.575,-19.45 -5.035,-18.99 -5.76,-18.99 -6.503,-18.246 -6.503,-16.092 -7.181,-15.414 -12.264,-15.414 -12.645,-15.795 SWD.4 -13.112,-16.412 -14,-17.3 S1.1 S1.2 -18.418,-15.933 -20.081,-15.933 -20.442,-16.294 -20.442,-17.175 ; C3.2 C3.2@-6.57,-21.581
I2C1_SCL: CN1.2 R11.1 U1.30 | length 19.5
  Top Layer w0.127: v1(-8.025,-17.2) -8.157,-17.068 -8.157,-15.843 -7.263,-14.95 CN1.2@-6.05,-14.95 ; U1.30 -6.613,-8.95 -6.425,-9.138 -6.425,-11.544 -6.754,-11.873 -6.754,-14.246 CN1.2@-6.05,-14.95 ; CN1.2 CN1.2@-6.05,-14.95 ; v1(-5.25,-20.025) -4.623,-20.025 -3.423,-21.225 R11.1@-3.075,-21.225
  Bottom Layer w0.127: v1@-8.109,-17.2 v1(-8.025,-17.2) -7.65,-17.2 -7.265,-17.585 -7.265,-19.051 -6.292,-20.025 v1(-5.25,-20.025) v1@-5.41,-19.865
I2C1_SDA: CN1.3 R12.1 U1.31 | length 20.6
  Top Layer w0.127: U1.31 -6.625,-8.45 -6.171,-8.904 -6.171,-11.649 -6.5,-11.978 -6.5,-13.77 -6.32,-13.95 CN1.3 -4.45,-13.95 -4.3,-14.1 -4.3,-16.339 -4.528,-16.568 -6.529,-16.568 -6.749,-16.347 v1(-7.121,-16.347) ; v1(-6.196,-19.247) -6.192,-19.251 -3.197,-19.251 -2.976,-19.472 R12.1@-2.95,-19.446
  Bottom Layer w0.127: v1(-7.121,-16.347) -6.884,-16.584 -6.884,-18.559 v1(-6.196,-19.247) v1@-6.132,-19.247
MOT+: D2.K pad.@-10.25,-24.775 T2.D | length 1.7
  Top Layer w1.024: T2.D@-10.95,-22.885 D2.K
  other v1: -7.5,-28.35 -11.975,-27.875 -7.084,-27.062 -9.262,-24.9 -6.3,-22.287 -6.825,-20.245 -5.575,-18.35 -11.305,-18.307
NetR2_1: R2.1 T1.3 T2.G | length 65.3
  Top Layer w0.127: T2.G@-16.3,-26.695 -16.3,-28.319 -15.894,-28.725 -10.25,-28.725 -10.025,-28.5 v1(-10.025,-27.998) ; R2.1@-3.7,-1.484 -4.925,-1.484 -4.925,-11.475 -3.23,-13.17 -3.23,-16.847 -4.132,-17.75 -5.02,-17.75 -5.025,-17.755 -6.583,-17.755 -7.45,-18.621 -7.45,-20.6 -8.355,-21.505 -8.355,-22.63 v1(-8.6,-22.876) -8.269,-22.876 -8.26,-22.885 -7.975,-22.6 -7.975,-21.525 -7.269,-20.819 -4.343,-20.819 -4.025,-21.137 -4.025,-21.7 -3.575,-22.15 -2.4,-22.15 -2.2,-21.95 -2.2,-18.75 -2.8,-18.15 -2.8,-9.825 -2.4,-9.425 T1.3
  Bottom Layer w0.127: v1(-10.025,-27.998) -10.025,-27.441 -7.799,-25.215 -7.647,-25.215 -7.36,-24.928 -7.36,-24.776 -7.233,-24.649 -7.647,-24.235 -8.257,-24.235 -8.6,-23.891 v1(-8.6,-22.876)
NetR3_1: R3.1 U1.7 | length 2.3
  Top Layer w0.127: R3.1@-18.15,-8.925 -18.15,-8.945 U1.7@-15.825,-8.945
NetR4_2: R4.2 R10.2 T1.1 | length 14.9
  Top Layer w0.127: R10.2 -7.184,-1.6 -6.842,-1.259 -6.842,-0.852 -6.65,-0.659 -0.794,-0.659 -0.65,-0.803 -0.65,-2.051 -0.893,-2.294 -1.282,-2.294 -1.65,-2.662 R4.2 -1.75,-3.577 T1.1 T1.1@-2,-6.675
NetR6_2: R6.2 U1.44 | length 6.1
  Top Layer w0.127: R6.2@-16.127,-1.723 R6.2 -16.15,-2.916 -15.72,-3.346 -13.804,-3.346 -13.525,-3.625 -12.545,-3.625 -12.35,-3.82 U1.44
NetR8_1: R8.1 R13.2 S3.2 S3.3 S3.4 | length 42.9
  Top Layer w0.127: R13.2@-36.525,-20.675 -35.31,-20.675 -35.075,-20.44 -35.075,-19.25 -34.625,-18.8 -33.075,-18.8 -32.761,-19.114 -32.761,-19.864 -32.525,-20.1 -31.95,-20.1 -30.7,-18.85 -30.7,-18.15 -29.875,-17.325 -28.731,-17.325 -28.525,-17.119 -28.525,-16.228 -26.5,-14.203 -21.36,-14.203 -20.442,-15.121 -20.442,-16.806 -20.275,-16.973 -20.275,-19.025 -19.8,-19.5 -19.259,-19.5 -18.972,-19.213 -18.972,-18.706 -18.573,-18.307 -18.573,-14.6 -17.075,-13.103 -15.489,-13.103 -14.346,-14.246 S3.2 -14.346,-16.647 S3.3 -14.44,-17.159 S3.4
"OUTPUT CIRCUIT": R10.1 U1.17 | length 24.3
  Top Layer w0.127: U1.17 -12.35,-14.595 -13.225,-15.47 -13.225,-16.706 -12.901,-17.03 -12.389,-17.03 -11.993,-16.633 -11.993,-16.157 -11.631,-15.795 -9.847,-15.795 -8.507,-14.455 -8.507,-3.568 -8.754,-3.321 -9.544,-3.321 -10.05,-2.815 R10.1@-10.05,-1.6
SEMI: C1.2 R1.1 S1.3 S1.4 U1.11 | length 25.1
  Top Layer w0.127: v1(-19.825,-16.55) -19.825,-14.775 -16.843,-11.793 -15.174,-11.793 -14.929,-11.548 -14.929,-11.171 -15.15,-10.95 U1.11
  Bottom Layer w0.127: v1(-19.825,-16.55) -19.249,-16.55 -17.218,-18.581 -12.356,-18.581 -12.356,-19.9 -14.05,-19.9 -14.65,-20.5 S1.3 S1.4
SWCLK: SWD.3 U1.37 | length 35.9
  Top Layer w0.127: SWD.3 -8.723,-19.065 -8.253,-19.065 -6.517,-17.33 -4.25,-17.33 -3.611,-16.69 -3.611,-13.307 -5.309,-11.608 -5.309,-5.216 -6.075,-4.45 -7.95,-4.45 -8.253,-4.147 -8.253,-3.463 -8.649,-3.067 -8.856,-3.067 -9.232,-2.691 -9.232,-0.843 -9.421,-0.655 ; -9.421,-0.654 -10.678,-0.654 -10.868,-0.843 -10.868,-2.357 -9.649,-3.575 -8.975,-3.575 -8.85,-3.7 U1.37
SWDIO: SWD.2 U1.34 | length 11
  Top Layer w0.127: SWD.2 -8.253,-14.561 -8.253,-7.153 -8.08,-6.98 -7.38,-6.98 U1.34
TRIGGER: C5.2 R13.1 U1.10 | length 49.5
  Top Layer w0.127: R13.1@-36.525,-22.675 -36.975,-23.125 -36.975,-23.625 -36.75,-23.85 -32.175,-23.85 -32,-23.675 C5.2 -31.223,-22.398 -30.646,-21.821 -30.646,-19.874 -29.938,-19.166 -29.938,-18.466 -29.559,-18.087 -28.415,-18.087 -27.763,-17.435 -27.763,-16.544 -27.238,-16.019 -26.873,-16.019 -25.539,-17.354 -24.432,-17.354 -23.503,-16.426 -23.503,-15.488 -23.12,-15.104 -21.537,-15.104 -21.204,-15.436 -21.204,-17.121 -21.037,-17.289 -21.037,-19.341 -20.293,-20.084 -20.293,-22.021 v1(-19.807,-22.507) ; v1(-19.6,-17.775) -19.081,-17.256 -19.081,-14.39 -16.738,-12.047 -15.069,-12.047 -14.675,-11.653 -14.675,-10.925 -15.15,-10.45 U1.10
  Bottom Layer w0.127: v1(-19.807,-22.507) -19.31,-22.01 -19.31,-19.859 -20.04,-19.128 -20.04,-18.215 v1(-19.6,-17.775)
pads on no net: CN1.GND U1.2 U1.3 U1.4 U1.5 U1.6 U1.14 U1.15 U1.16 U1.18 U1.19 U1.20 U1.21 U1.22 U1.25 U1.26 U1.27 U1.28 U1.29 U1.32 U1.33 U1.35 U1.36 U1.38 U1.39 U1.40 U1.41 U1.42 U1.43 U1.45 U1.46

## Polygon pours and split planes (outlines as drawn)
MOT+ on Top Layer "Top Layer-MOT-" (solid, pour order 20): -14.092,-28.826 -4.892,-28.826 -4.892,-25.676 -2.567,-23.351 -0.145,-23.351 -0.117,-23.329 -0.117,-12.473 -14.175,-12.473
BATT+ on Top Layer "Top Layer-BATT+" (solid, pour order 10): -27.525,-24.625 -27.525,-14.4 -23.9,-14.4 -14.575,-14.4 -14.575,-28.8 -19.75,-28.8 -19.75,-27.062 -22.187,-24.625
GND on Top Layer "Top Layer-GND" (solid, pour order 4): -27.747,-12.6 -22.65,-12.6 -22.65,-12.5 -18.999,-12.5 -20.499,-14 -27.747,-14 -27.747,-24.625 -38.075,-24.625 -43.4,-19.3 -43.4,-12.6
GND on Top Layer "GND_L01_P002" (solid, pour order 2): -20.4,-0.1 -22.65,-2.35 -22.65,-12.5 -0.1,-12.5 -0.1,-0.1
MOT+ on Bottom Layer "MOT+_L02_P018" (solid, pour order 18): -22.525,-12.231 -22.525,-2.254 -20.421,-0.15 -0.175,-0.15 -0.175,-23.344 -2.619,-23.344 -4.95,-25.675 -4.95,-28.8 -12.6,-28.8 -12.6,-12.256
BATT+ on Bottom Layer "BATT+_L02_P014" (solid, pour order 14): -38.1,-24.6 -43.3,-19.4 -43.3,-12.675 -12.925,-12.675 -12.925,-28.8 -19.75,-28.8 -19.75,-27 -22.15,-24.6

## Silkscreen, mask and mechanical layers (free items; w line width, h text height)
Top Overlay:
  text "BATT+" at -18.275,-24.375 h0.9 r90
  text "MOT+" at -8.194,-24.825 h0.9 r90
Bottom Overlay:
  text "ST-FET v2 / PAWELOCHOJEC@GMAIL.COM / 08/2019" at -1.45,-7.825 h0.9
Board Outline:
  circle w0: c-27.55,-20.55 r2
  circle w0: c-12.6,-1.6 r1.25
  circle w0: c-25.075,-15.775 r1
  lines w0.254: -43.5,-19.425 -41.15,-21.775 -38.175,-24.75 -22.25,-24.75 -19.95,-27.05 -19.95,-29 -4.825,-29 -4.825,-25.65 -2.675,-23.5 0,-23.5 0,0 -11.25,0 -11.875,0 -13.125,0 -13.75,0 -20.5,0 -22.75,-2.25 -22.75,-2.5 -22.75,-5 -22.75,-10 -22.75,-12.5 -33.45,-12.5 -42.725,-12.5 -43.5,-12.5 -43.5,-16.825 -43.5,-19.425
Bottom outline:
  lines w0.254: -24.575,-24.75 -22.25,-24.75 -19.95,-27.05 -19.95,-28.225 -19.925,-28.25 -18.725,-28.25 -4.825,-28.25 -4.825,-25.625 -4.575,-25.375 -4.575,-15.8 -20.55,-15.8 -20.55,-23.275 -20.575,-23.3 -24.575,-23.3 -24.575,-24.75